# EAGLE board stm32f303_devboard (EAGLE 6.3)
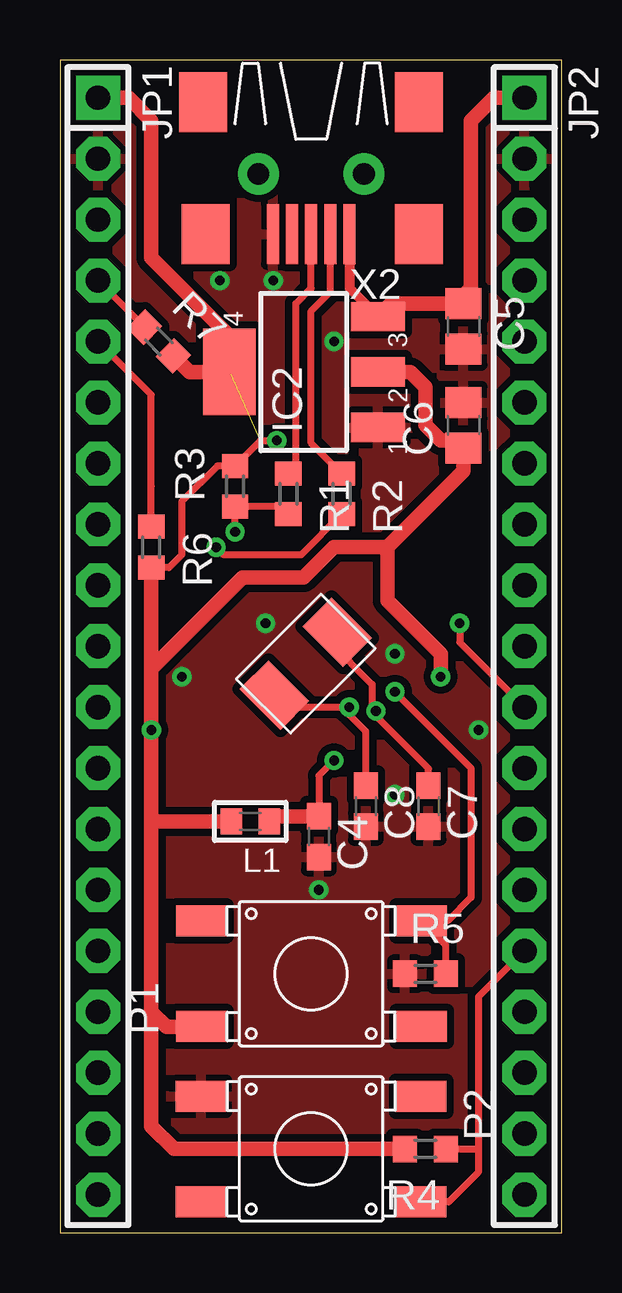
[diagram p0: board, top side]
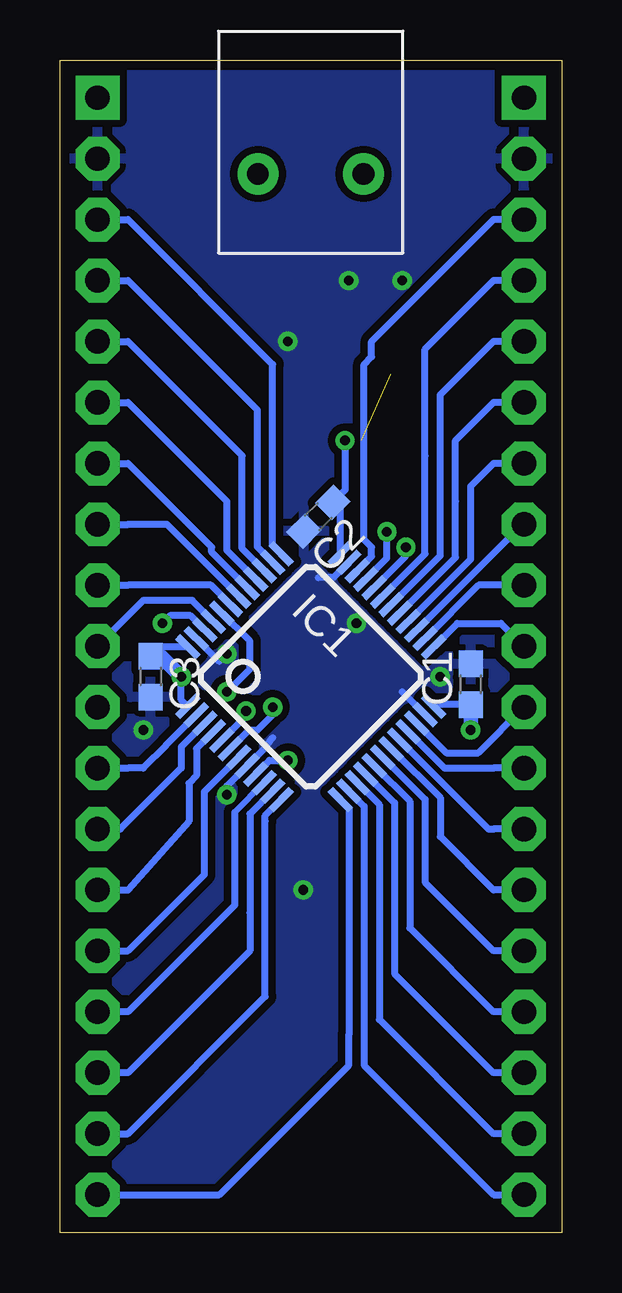
[diagram p1: board, bottom side, seen from below]

Size 20.93 x 48.88 mm. Coordinates in mm from the lower left corner, seen from the top.
Outline: 0,0 20.93,0 20.93,48.88 0,48.88 0,0
Copper layers (1*16): Top 0.035mm / dielectric 1.5mm / Bottom 0.035mm
Design rules "default *": minimum track width 10mil, minimum drill 0.4mm, track to track 0.2mm, track to pad 0.2mm, pad to pad 0.2mm, via to via 0.2mm, smd to smd 0mil, copper to edge 0.4mm, drill to drill 0.4mm, minimum pad ring 16mil, minimum via ring 8mil, stop-mask expansion 4mil, vias tented up to drill 0mil, thermal gap 10mil

## Footprints (pad centres in the part's own frame; a part is rotated, then mirrored left to right if it is on the bottom)
C0603 = smd 1.1 x 1: 1 -0.85,0; 2 0.85,0
C0805 = smd 1.3 x 1.5: 1 -0.95,0; 2 0.95,0
TQFP48 = smd 0.3 x 1.2: 1 -2.75,-4.5; 2 -2.25,-4.5; 3 -1.75,-4.5; 4 -1.25,-4.5; 5 -0.75,-4.5; 6 -0.25,-4.5; 7 0.25,-4.5; 8 0.75,-4.5; 9 1.25,-4.5; 10 1.75,-4.5; 11 2.25,-4.5; 12 2.75,-4.5; 25 2.75,4.5; 26 2.25,4.5; 27 1.75,4.5; 28 1.25,4.5; 29 0.75,4.5; 30 0.25,4.5; 31 -0.25,4.5; 32 -0.75,4.5; 33 -1.25,4.5; 34 -1.75,4.5; 35 -2.25,4.5; 36 -2.75,4.5 | smd 1.2 x 0.3: 13 4.5,-2.75; 14 4.5,-2.25; 15 4.5,-1.75; 16 4.5,-1.25; 17 4.5,-0.75; 18 4.5,-0.25; 19 4.5,0.25; 20 4.5,0.75; 21 4.5,1.25; 22 4.5,1.75; 23 4.5,2.25; 24 4.5,2.75; 37 -4.5,2.75; 38 -4.5,2.25; 39 -4.5,1.75; 40 -4.5,1.25; 41 -4.5,0.75; 42 -4.5,0.25; 43 -4.5,-0.25; 44 -4.5,-0.75; 45 -4.5,-1.25; 46 -4.5,-1.75; 47 -4.5,-2.25; 48 -4.5,-2.75
SOT223 = smd 1.219 x 2.235: 1 -2.311,-3.099; 2 0,-3.099; 3 2.311,-3.099 | smd 3.6 x 2.2: 4 0,3.099
1X19 = drill 1.016 square: 1 -22.86,0 | drill 1.016 octagon: 2 -20.32,0; 3 -17.78,0; 4 -15.24,0; 5 -12.7,0; 6 -10.16,0; 7 -7.62,0; 8 -5.08,0; 9 -2.54,0; 10 0,0; 11 2.54,0; 12 5.08,0; 13 7.62,0; 14 10.16,0; 15 12.7,0; 16 15.24,0; 17 17.78,0; 18 20.32,0; 19 22.86,0
L0603 = smd 0.9 x 1.1: 1 -0.794,0; 2 0.794,0
FSM4JSMA-SMD = smd 1.3 x 2.1: P$1 -2.196,4.584; P$2 -2.196,-4.6; P$3 2.204,4.584; P$4 2.204,-4.6
R0603 = smd 1 x 1.1: 1 -0.85,0; 2 0.85,0
2-SMD = smd 1.7 x 2.4: P$1 -1.85,0; P$2 1.85,0
USB-MB-S = smd 2.5 x 0.5: D+ 2.5,0; D- 2.5,0.8; GND 2.5,-1.6; ID 2.5,-0.8; VBUS 2.5,1.6 | smd 2.5 x 2: P$1 -3,-4.5; P$2 -3,4.5; P$3 2.5,-4.4; P$4 2.5,4.5 | drill 0.9: P$5 0,2.2; P$6 0,-2.2

## Placement (x,y rotation side)
C1  100n  [C0603]  3.81,22.86 90 bottom
C2  100n  [C0603]  10.16,29.84 225 bottom
C3  100n  [C0603]  17.14,23.18 270 bottom
C4  100n  [C0603]  10.79,16.51 270 top
C5  10u  [C0805]  16.83,37.78 270 top
C6  10u  [C0805]  16.83,33.66 90 top
C7  16p  [C0603]  15.37,17.78 270 top
C8  16p  [C0603]  12.75,17.78 270 top
IC1  STM32F10XCXT6  [TQFP48]  10.48,23.18 315 bottom
IC2  [SOT223]  10.16,35.88 90 top
JP1  [1X19]  1.59,24.45 270 top
JP2  [1X19]  19.37,24.45 270 top
L1  FB_0603  [L0603]  7.94,17.14 180 top
P1  FSM4JSMA-SMD  [FSM4JSMA-SMD]  10.48,10.79 90 top
P2  FSM4JSMA-SMD  [FSM4JSMA-SMD]  10.48,3.49 270 top
R1  22  [R0603]  9.53,30.8 270 top
R2  22  [R0603]  11.75,30.8 270 top
R3  1.5k  [R0603]  7.3,31.11 90 top
R4  10k  [R0603]  15.24,3.49 180 top
R5  10k  [R0603]  15.24,10.79 0 top
R6  10k  [R0603]  3.81,28.57 270 top
R7  10k  [R0603]  4.13,37.15 315 top
U$1  8MHz  [2-SMD]  10.25,23.72 45 top
X2  [USB-MB-S]  10.48,44.13 270 top

## Library data of the parts
C1-C8 R1-R7 = rcl
IC1 = stm32
IC2 = v-reg-2
JP1 JP2 = pinhead
L1 = rc-master
P1 P2 = switch-misc
U$1 = txc-7a
X2 = con-usb-3

## Nets
!RST!: IC1.7 JP2.15 P2.P$3 R4.1
+3V3: C1.1 C2.1 C3.1 C6.1 IC1.1 IC1.24 IC1.36 IC1.48 IC2.2 IC2.4 JP1.1 L1.2 P1.P$1 R3.2 R4.2 R6.2 R7.2
A0: IC1.10 JP2.16
A1: IC1.11 JP2.17
A2: IC1.12 JP2.18
A3: IC1.13 JP2.19
A4: IC1.14 JP1.19
A5: IC1.15 JP1.18
A6: IC1.16 JP1.17
A7: IC1.17 JP1.16
A8: IC1.29 JP1.6
A9: IC1.30 JP1.5 R6.1
A10: IC1.31 JP1.4 R7.1
A13: IC1.34 JP1.3
A14: IC1.37 JP2.3
A15: IC1.38 JP2.4
B0: IC1.18 JP1.15
B1: IC1.19 JP1.14
B2: IC1.20 JP1.13
B3: IC1.39 JP2.5
B4: IC1.40 JP2.6
B5: IC1.41 JP2.7
B6: IC1.42 JP2.8
B7: IC1.43 JP2.9
B8: IC1.45 JP2.10
B9: IC1.46 JP2.11
B10: IC1.21 JP1.12
B11: IC1.22 JP1.11
B12: IC1.25 JP1.10
B13: IC1.26 JP1.9
B14: IC1.27 JP1.8
B15: IC1.28 JP1.7
BOOT0: IC1.44 P1.P$4 R5.2
C13: IC1.2 JP2.12
C14: IC1.3 JP2.13
C15: IC1.4 JP2.14
D+: IC1.33 R1.2 R3.1
D-: IC1.32 R2.2
GND: C1.2 C2.2 C3.2 C4.2 C5.2 C6.2 C7.2 C8.2 IC1.8 IC1.23 IC1.35 IC1.47 IC2.1 JP1.2 JP2.2 P2.P$2 R5.1 X2.GND
N$1: C7.1 IC1.5 U$1.P$2
N$2: R1.1 X2.D+
N$3: R2.1 X2.D-
N$4: C8.1 IC1.6 U$1.P$1
N$5: C4.1 IC1.9 L1.1
VUSB: C5.1 IC2.3 JP2.1 X2.VBUS

## Tracks (layer width: path | path; a pad name or v marks a point on that pad's centre or on a via)
!RST!
  Top 0.3: 17.46,3.49 17.46,2.54 16.21,1.29 P2.P$3 | 17.46,3.49 17.46,9.84 JP2.15 | R4.1 17.46,3.49
  Bottom 0.3: JP2.15 18.1,11.75 14.92,14.92 14.92,18.38 IC1.7
+3V3  (via drill 0.4)  (1 unrouted)
  Top 0.3: 3.91,25.93 3.81,26.04 | v9.05,33.02 8.36,33.02 R3.2 6.57,31.96 5.08,30.48 5.08,28.26 4.55,27.73 R6.2
  Top 0.406: 5.55,8.57 P1.P$1
  Top 0.61: IC2.4 7.14,35.8 | 3.81,23.5 3.81,26.04 R6.2 | 3.81,23.5 v3.81,20.95 3.81,17.14 | 3.81,17.14 3.81,9.84 3.81,9.21 | 3.81,9.21 4.45,8.57 5.55,8.57 | R4.2 4.76,3.49 3.81,4.45 3.81,9.21 | L1.2 3.81,17.14 | JP1.1 2.86,47.31 3.81,46.35 3.81,40.64 7.06,37.39 IC2.4 | R7.2 5.4,35.88 IC2.4 | IC2.2 14.61,35.88 15.24,35.24 15.24,33.66 15.88,33.02 16.51,33.02 C6.1 16.83,31.75 13.65,28.57 | 13.65,28.57 11.43,28.57 10.16,27.3 7.62,27.3 3.81,23.5 | 13.65,28.57 13.65,26.35 15.24,24.77 15.88,24.13 v15.88,23.18
  Bottom 0.3: C1.1 5.35,22.01 IC1.24 | 17.14,24.13 C3.1 16.76,24.41 IC1.48 | IC1.1 15.88,22.21 v15.88,23.18 | IC1.36 9.24,30.13 C2.1 9.05,30.96 v9.05,33.02
  Bottom 0.61: C1.1 v3.81,20.95 | v15.88,23.18 16.73,24.03 C3.1
A0
  Bottom 0.28: IC1.10 13.65,17.53
  Bottom 0.3: 13.65,17.53 13.65,15.56 13.65,13.65 18.1,9.21 JP2.16
A1
  Bottom 0.3: IC1.11 13.02,17.46 13.02,13.34 13.02,11.75 18.1,6.67 JP2.17
A2
  Bottom 0.3: JP2.18 18.1,4.13 12.38,9.84 12.38,17.14 12.38,17.38 IC1.12
A3
  Bottom 0.3: IC1.13 8.89,17.7 8.89,8.26 8.89,6.99 14.29,1.59 JP2.19
A4
  Bottom 0.3: IC1.14 8.26,17.77 8.26,6.99 2.86,1.59 JP1.19
A5
  Bottom 0.3: IC1.15 7.62,17.84 7.62,8.89 2.86,4.13 JP1.18
A6
  Bottom 0.3: IC1.16 6.99,17.92 6.99,10.79 2.86,6.67 JP1.17
A7
  Bottom 0.3: IC1.17 6.35,17.99 6.35,12.7 2.86,9.21 JP1.16
A8
  Bottom 0.3: IC1.29 4.45,28.15 4.45,30.48 4.45,33.02 2.86,34.61 JP1.6
A9
  Top 0.3: R6.1 3.81,31.11 3.81,34.92 JP1.5
  Bottom 0.3: IC1.30 5.08,28.22 5.08,33.34 5.08,34.92 2.86,37.15 JP1.5
A10
  Top 0.3: R7.1 JP1.4
  Bottom 0.3: IC1.31 5.71,28.29 5.71,32.38 5.71,36.83 2.86,39.69 JP1.4
A13
  Bottom 0.3: IC1.34 7.94,28.19 7.94,28.57 8.26,28.89 8.26,36.2 7.94,36.51 7.94,37.15 2.86,42.23 JP1.3
A14
  Bottom 0.3: JP2.3 18.1,42.23 12.06,36.2 12.06,28.65 IC1.37
A15
  Bottom 0.3: JP2.4 18.1,39.69 12.7,34.29 12.7,28.58 IC1.38
B0
  Bottom 0.3: IC1.18 5.71,18.06 5.71,14.61 2.86,11.75 JP1.15
B1
  Bottom 0.3: IC1.19 5.08,18.13 5.08,16.51 2.86,14.29 JP1.14
B2
  Bottom 0.3: IC1.20 3.07,16.83 2.86,16.83 JP1.13
B3
  Bottom 0.3: JP2.5 18.1,37.15 13.34,32.38 13.34,28.51 IC1.39
B4
  Bottom 0.3: JP2.6 18.1,34.61 13.97,30.48 13.97,28.44 IC1.40
B5
  Bottom 0.3: JP2.7 18.1,32.07 14.61,28.57 14.61,28.37 IC1.41
B6
  Bottom 0.3: JP2.8 18.1,29.53 16.47,29.53 IC1.42
B7
  Bottom 0.3: JP2.9 18.1,26.99 14.64,26.99 IC1.43
B8
  Bottom 0.3: IC1.45 15.42,26.35 17.46,26.35 JP2.10
B9  (via drill 0.4)
  Top 0.3: v16.67,25.4 16.67,24.61 JP2.11
  Bottom 0.3: IC1.46 15.49,25.72 16.35,25.72 v16.67,25.4
B10
  Bottom 0.3: IC1.21 4.9,19.37 2.86,19.37 JP1.12
B11
  Bottom 0.3: IC1.22 4.83,20 3.49,20 JP1.11
B12
  Bottom 0.3: IC1.25 4.37,25.4 2.54,25.4 JP1.10
B13
  Bottom 0.3: IC1.26 3.49,26.99 JP1.9
B14
  Bottom 0.3: IC1.27 1.65,29.53 JP1.8
B15
  Bottom 0.3: IC1.28 3.81,28.08 3.81,30.16 3.81,31.11 2.86,32.07 JP1.7
BOOT0  (via drill 0.4)
  Top 0.3: R5.2 16.09,11.99 P1.P$4 16.17,13 17.14,13.97 17.14,18.73 17.14,19.37 v13.97,22.54
  Bottom 0.3: v13.97,22.54 13.02,23.5 13.02,24.66 IC1.44
C13
  Bottom 0.3: JP2.12 18.1,19.37 17.46,19.37 16.51,20.32 16.51,20.33 IC1.2
C14
  Bottom 0.3: JP2.13 18.41,16.83 15.88,19.37 15.88,20.25 IC1.3
C15
  Bottom 0.3: JP2.14 18.1,14.29 15.56,17.14 15.56,18.73 15.24,19.05 15.24,20.18 IC1.4
D+  (via drill 0.4)
  Top 0.3: R1.2 9.21,30.27 R3.1 v7.3,29.21
  Bottom 0.3: IC1.33 7.3,28.12 v7.3,29.21
D-  (via drill 0.4)
  Top 0.3: R2.2 10.06,28.26 7.3,28.26 6.83,28.26 v6.51,28.57
  Bottom 0.3: IC1.32 6.51,28.21 v6.51,28.57
GND  (via drill 0.4)
  Bottom 0.3: IC1.35 9.53,27.3 10.16,27.3 | IC1.23 6.66,22.54 6.67,22.54 | 12.06,20.64 12.38,20.21 IC1.8 13.97,18.62 v13.97,18.26 | IC1.47 14.29,23.81
  other vias: 5.08,23.18 17.46,20.95 13.97,24.13 6.67,39.69 8.89,39.69 8.57,25.4 11.43,37.15 10.79,14.29
  pour Bottom (isolate 0.305, rank 6): 0,0 20.95,0 20.95,48.9 0,48.9
  pour Top (isolate 0.305, rank 6): 0,0 20.95,0 20.95,48.9 0,48.9
N$1  (via drill 0.4)
  Top 0.3: C7.1 15.37,19.34 IC1.5 13.13,21.59 v13.18,21.75 13.02,21.91 13.02,22.86 11.24,24.63 U$1.P$2
  Bottom 0.3: v13.18,21.75 13.13,21.59 IC1.5
N$2
  Top 0.3: R1.1 9.84,31.96 9.84,38.42 9.84,38.73 10.48,39.37 X2.D+
N$3
  Top 0.3: R2.1 10.48,32.92 10.48,38.42 11.28,39.22 X2.D-
N$4  (via drill 0.4)
  Top 0.3: C8.1 12.75,20.9 12.22,21.43 12.06,21.59 v12.06,21.91 9.45,21.91 U$1.P$1
  Bottom 0.3: IC1.6 13.05,20.95 12.7,20.95 12.06,21.59 v12.06,21.91
N$5  (via drill 0.4)
  Top 0.3: v11.43,19.68 10.79,19.05 C4.1
  Top 0.61: L1.1 8.95,17.36 C4.1
  Bottom 0.3: IC1.9 12.2,19.68 v11.43,19.68
VUSB
  Top 0.305: 12.39,38.42 IC2.3
  Top 0.406: X2.VBUS 12.08,39.37 IC2.3
  Top 0.61: JP2.1 18.1,47.31 17.14,46.35 17.14,39.37 16.51,38.73 15.88,38.73 C5.1 13.8,38.73 IC2.3

## Text on the board
Document: +3V3 / GND / A13* / A10* / A9* / A8* / B15 / B14 / B13 / B12 / B11 / B10 / B2 / B1 / B0 / A7 / A6 / A5 / A4 | VUSB / GND / *A14 / *A15 / *B3 / *B4 / *B5 / *B6 / *B7 / *B8 / *B9 / C13 / C14 / C15 / !RST! / A0 / A1 / A2 / A3 | BOOT | RESET | * = 5V tolerant pin